# EAGLE board servo_distribute (EAGLE 9.6.2)
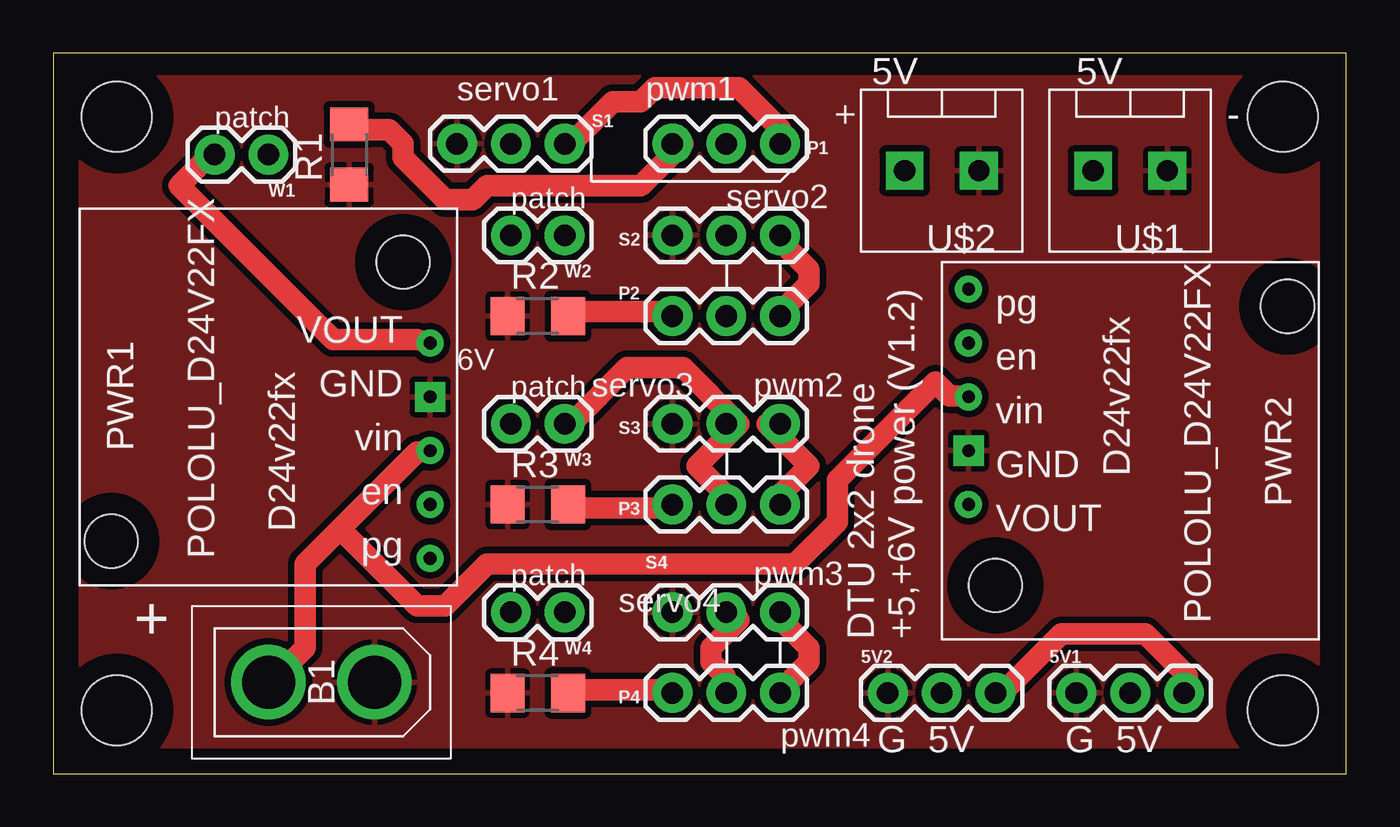
[diagram p0: board, top side]
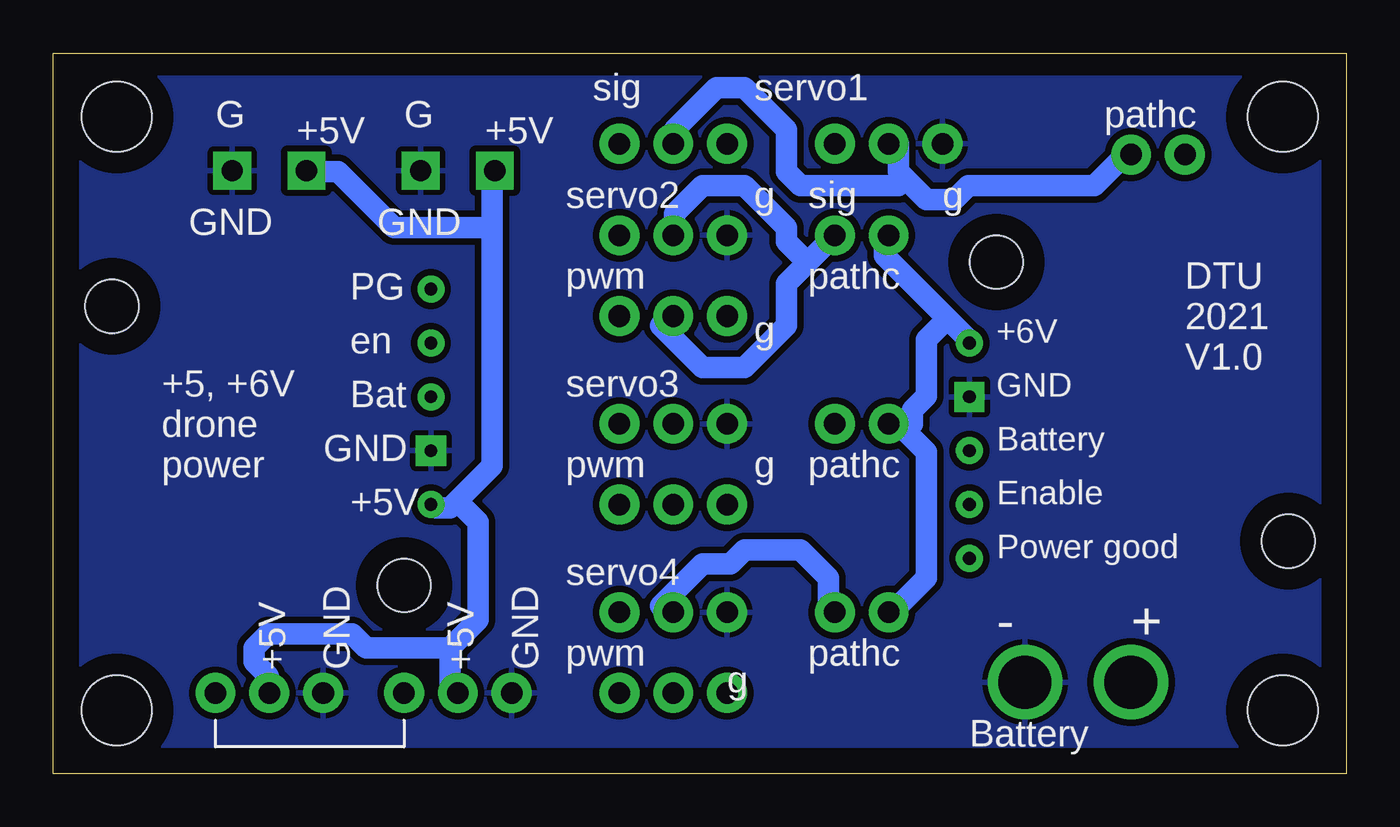
[diagram p1: board, bottom side, seen from below]

Size 61 x 34 mm. Coordinates in mm from the lower left corner, seen from the top.
Outline: 0,0 61,0 61,34 0,34 0,0
Copper layers (1*16): Top 0.035mm / dielectric 1.5mm / Bottom 0.035mm
Design rules "default *": minimum track width 40mil, minimum drill 0.5mm, track to track 12mil, track to pad 12mil, pad to pad 12mil, via to via 12mil, smd to smd 12mil, copper to edge 40mil, drill to drill 20mil, minimum pad ring 10mil, minimum via ring 8mil, stop-mask expansion 8mil, vias tented up to drill 0mil, thermal gap 10mil
Holes 3.3 mm at 3,3 3,31 58,31 58,3

## Footprints (pad centres in the part's own frame; a part is rotated, then mirrored left to right if it is on the bottom)
1X03 = drill 1.016 pad 1.88: 1 0,0; 2 2.54,0; 3 5.08,0
XT30PB = drill 2.5: V+ 0,0; V- 0,-5
POLOLU_D24V22F6 = drill 0.6 pad 1.27: EN -1.27,-2.54; PG -3.81,-2.54; VIN 1.27,-2.54; VOUT 6.35,-2.54 | drill 0.6 pad 1.422 square: GND 3.81,-2.54 | hole 2.5: 10.16,-1.27; -3,12.5
R1206 = smd 1.6 x 1.803: 1 -1.422,0; 2 1.422,0
TERMINAL_3.5MM = drill 1 pad 1.778 square: F 1.75,0; G -1.75,0
1X02 = drill 1.016 pad 1.88: 1 0,0; 2 2.54,0

## Placement (x,y rotation side)
5V1  [1X03]  48.26,3.81 0 top
5V2  [1X03]  39.37,3.81 0 top
B1  XT30  [XT30PB]  10.16,4.32 90 top
P1  [1X03]  29.21,29.72 0 top
P2  [1X03]  29.21,21.59 0 top
P3  [1X03]  29.21,12.7 0 top
P4  [1X03]  29.21,3.81 0 top
PWR1  POLOLU_D24V22FX  [POLOLU_D24V22F6]  15.24,13.97 90 top
PWR2  POLOLU_D24V22FX  [POLOLU_D24V22F6]  45.72,19.05 270 top
R1  10  [R1206]  13.97,29.21 90 top
R2  10  [R1206]  22.86,21.59 0 top
R3  10  [R1206]  22.86,12.7 0 top
R4  10  [R1206]  22.86,3.81 0 top
S1  [1X03]  19.05,29.72 0 top
S2  [1X03]  29.21,25.4 0 top
S3  [1X03]  29.21,16.51 0 top
S4  [1X03]  29.21,7.62 0 top
U$1  TERMINAL_3.5MM  [TERMINAL_3.5MM]  50.8,28.45 180 top
U$2  TERMINAL_3.5MM  [TERMINAL_3.5MM]  41.91,28.45 180 top
W1  [1X02]  10.16,29.21 180 top
W2  [1X02]  24.13,25.4 180 top
W3  [1X02]  24.13,16.51 180 top
W4  [1X02]  24.13,7.62 180 top

## Library data of the parts
5V1 5V2 P1-P4 S1-S4 W1-W4 = SparkFun-Connectors
B1 = XT30PB; DESCRIPTION: Mini XT60 XT30 Connector for RC Multirotor Racing Drone Quadcopter; HEIGHT: 10.7mm; MANUFACTURER_NAME: Amass; MANUFACTURER_PART_NUMBER: XT30PB
PWR1 PWR2 U$1 U$2 = chrand
R1-R4 = eagle-ltspice; SPICEMODEL: NONE; SPICEPREFIX: R

## Nets
5V: 5V1.2 5V2.2 PWR2.VOUT U$1.F U$2.F
6V: PWR1.VOUT W1.2 W2.2 W3.2 W4.2
6V1: P1.2 S1.2 W1.1
6V2: P2.2 S2.2 W2.1
6V3: P3.2 S3.2 W3.1
6V4: P4.2 S4.2 W4.1
BATTERY: B1.V+ PWR1.VIN PWR2.VIN
G1: P1.1 R1.2
G2: P2.1 R2.2
G3: P3.1 R3.2
G4: P4.1 R4.2
GND: 5V1.1 5V2.1 B1.V- PWR1.GND PWR2.GND R1.1 R2.1 R3.1 R4.1 S1.1 S2.1 S3.1 S4.1 U$1.G U$2.G
S1: P1.3 S1.3
S2: P2.3 S2.3
S3: P3.3 S3.3
S4: P4.3 S4.3
S5: 5V1.3 5V2.3

## Tracks (layer width: path | path; a pad name or v marks a point on that pad's centre or on a via)
5V
  Bottom 1.016: 41.94,12.88 40.28,14.53 40.28,25.76 | 41.94,12.88 42.27,12.55 42.93,12.55 PWR2.VOUT | 40.28,25.76 40.28,28.4 U$2.F | 40.28,25.76 44.91,25.76 47.55,28.4 48.87,28.4 U$1.F | 42.27,5.94 42.27,3.96 5V2.2 | 42.27,5.94 40.95,7.26 40.95,11.89 41.94,12.88 | 42.27,5.94 46.23,5.94 46.89,6.6 50.85,6.6 51.51,5.94 51.51,5.28 50.85,4.62 50.85,3.96 5V1.2
6V
  Top 1.016: W1.2 7.26,29.06 5.94,27.74 13.21,20.47 17.17,20.47 PWR1.VOUT
  Bottom 1.016: 20.8,16.18 21.13,16.51 W3.2 | 20.8,16.18 19.81,15.19 19.81,9.25 21.13,7.92 W4.2 | 18.82,21.46 21.79,24.43 21.79,25.09 W2.2 | 18.82,21.46 17.83,20.47 PWR1.VOUT | 18.82,21.46 19.81,20.47 19.81,17.83 20.47,17.17 20.47,16.51 20.8,16.18
6V1
  Bottom 1.016: 20.8,28.07 21.13,28.4 21.13,29.72 S1.2 | 20.8,28.07 19.81,27.08 18.49,27.08 17.83,27.74 11.89,27.74 10.57,29.06 W1.1 | P1.2 31.7,29.72 31.7,30.38 29.72,32.36 28.4,32.36 26.42,30.38 26.42,28.4 25.76,27.74 21.13,27.74 20.8,28.07
6V2
  Bottom 1.016: 25.43,24.11 26.42,23.11 26.42,21.13 28.4,19.15 30.38,19.15 32.36,21.13 P2.2 | 25.43,24.11 W2.1 | 25.43,24.11 26.42,25.09 26.42,25.76 28.4,27.74 30.38,27.74 31.7,26.42 31.7,25.76 S2.2
6V3
  Top 1.016: 32.36,16.51 29.72,19.15 27.08,19.15 24.43,16.51 W3.1 | 32.36,16.51 30.38,14.53 31.7,13.21 P3.2 | 32.36,16.51 S3.2
6V4
  Top 1.016: P4.2 31.7,3.96 31.7,4.62 31.04,5.28 31.04,5.94 32.36,7.26 S4.2
  Bottom 1.016: W4.1 24.43,7.92 24.43,9.25 25.76,10.57 28.4,10.57 29.06,9.91 30.38,9.91 32.36,7.92 S4.2
BATTERY
  Top 1.016: 13.54,11.56 11.89,9.91 11.89,5.94 10.57,4.62 B1.V+ | 13.54,11.56 17.17,15.19 PWR1.VIN | 13.54,11.56 17.17,7.92 18.49,7.92 20.47,9.91 35,9.91 36.98,11.89 36.98,13.87 41.6,18.49 42.27,17.83 42.93,17.83 PWR2.VIN
G1
  Top 1.016: R1.2 14.53,30.38 15.85,30.38 16.51,29.72 16.51,29.06 18.49,27.08 19.81,27.08 20.47,27.74 27.74,27.74 29.72,29.72 P1.1
G2
  Top 1.016: R2.2 24.43,21.79 29.06,21.79 P2.1
G3
  Top 1.016: R3.2 24.43,12.55 29.06,12.55 P3.1
G4
  Top 1.016: R4.2 24.43,3.96 29.06,3.96 P4.1
GND
  pour Top: 1.27,33.02 1.27,1.27 59.69,1.27 59.69,33.02
  pour Bottom: 1.27,33.02 1.27,1.27 59.69,1.27 59.69,33.02
S1
  Top 1.016: S1.3 24.43,29.72 26.42,31.7 27.74,31.7 28.4,32.36 32.36,32.36 34.34,30.38 34.34,29.72 P1.3
S2
  Top 1.016: P2.3 34.34,21.79 35.66,23.11 35.66,23.77 34.34,25.09 S2.3
S3
  Top 1.016: P3.3 34.34,13.21 35.66,14.53 33.68,16.51 S3.3
S4
  Top 1.016: P4.3 34.34,3.96 35.66,5.28 35.66,5.94 34.34,7.26 S4.3
S5
  Top 1.016: 5V2.3 44.91,3.96 47.55,6.6 51.51,6.6 53.49,4.62 53.49,3.96 5V1.3

## Text on the board
tNames: 5V | 5V | servo1 | pwm1 | patch | + | - | patch | servo2 | 6V | patch | servo3 | pwm2 | patch | pwm3 | servo4 | + | DTU 2x2 drone / +5,+6V power (V1.2) | pwm4 | G 5V | G 5V
bNames: servo1 | sig | pathc | +5V | G | +5V | G | g | sig | g | servo2 | GND | GND | pathc | pwm | PG | +6V | g | en | DTU / 2021 / V1.0 | GND | servo3 | Bat | Battery | GND | pathc | g | pwm | +5, +6V / drone / power | Enable | +5V | Power good | servo4 | GND | GND | +5V | +5V | + | - | pathc | pwm | g | Battery